# EAGLE board pc_healthypi_5.6 (EAGLE 9.6.2), part 1 of 2
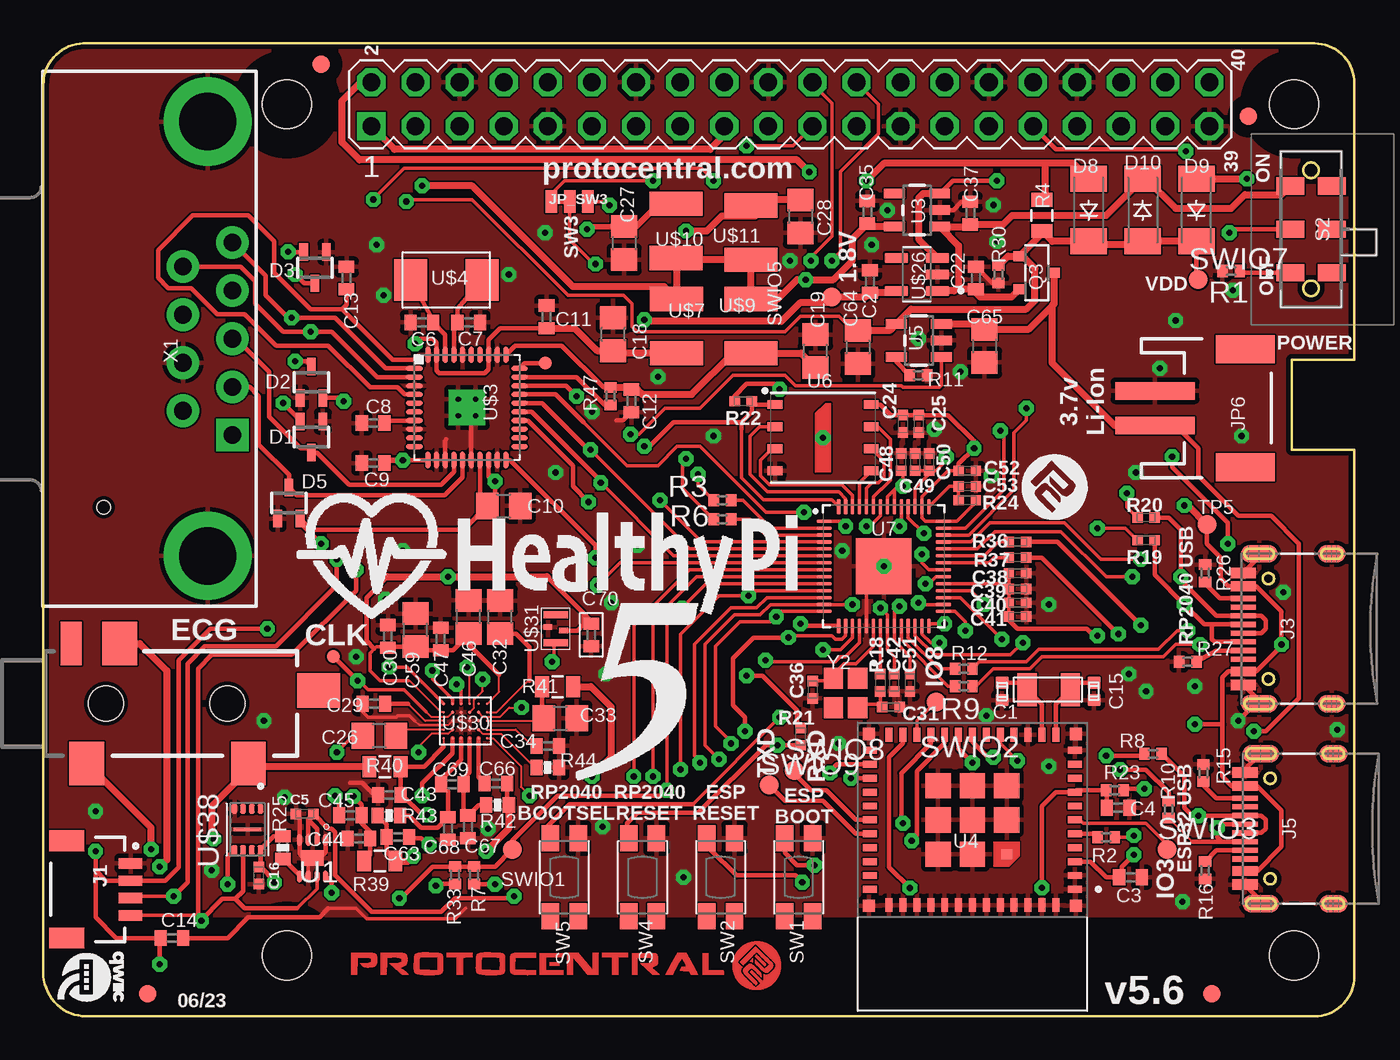
[diagram p0: board, top side]
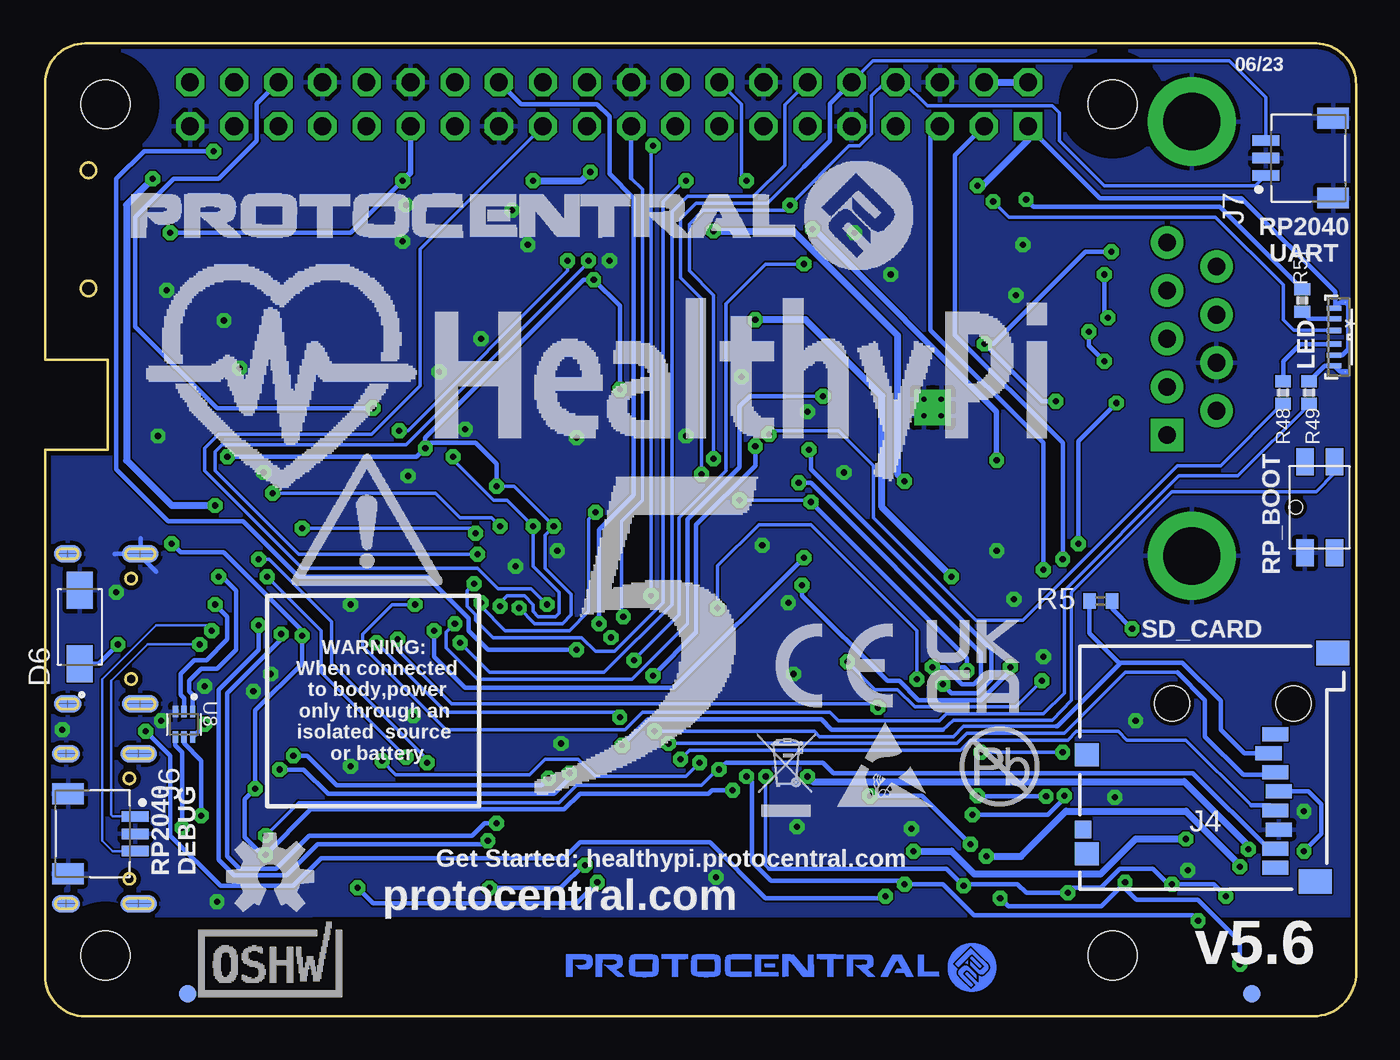
[diagram p1: board, bottom side, seen from below]

Size 75.5 x 56.01 mm. Coordinates in mm from the lower left corner, seen from the top.
Outline: 69.47,26.33 69.44,26.33 69.41,26.33 69.39,26.34 69.36,26.35 69.34,26.36 69.31,26.37 69.29,26.38 69.27,26.4 69.25,26.42 69.23,26.43 69.22,26.46 69.2,26.48 69.19,26.5 69.18,26.52 69.17,26.55 69.17,26.58 69.17,26.6 69.17,26.63 69.17,26.65 69.17,26.68 69.17,26.71 69.18,26.73 69.19,26.75 69.2,26.78 69.22,26.8 69.23,26.82 69.25,26.84 69.27,26.86 69.29,26.87 69.31,26.89 69.34,26.9 69.36,26.91 69.39,26.92 69.41,26.92 69.44,26.93 69.47,26.93 70.56,26.93 70.59,26.93 70.62,26.92 70.64,26.92 70.67,26.91 70.69,26.9 70.72,26.89 70.74,26.87 70.76,26.86 70.78,26.84 70.8,26.82 70.81,26.8 70.83,26.78 70.84,26.75 70.85,26.73 70.86,26.71 70.86,26.68 70.86,26.65 70.86,26.63 70.86,26.6 70.86,26.58 70.86,26.55 70.85,26.52 70.84,26.5 70.83,26.48 70.81,26.46 70.8,26.43 70.78,26.42 70.76,26.4 70.74,26.38 70.72,26.37 70.69,26.36 70.67,26.35 70.64,26.34 70.62,26.33 70.59,26.33 70.56,26.33 69.47,26.33
Outline: 73.03,48.26 arc173 73.03,49.16 72.97,49.16 arc173 72.97,48.26 73.03,48.26
Outline: 70.57,19.09 arc172 70.57,19.74 70.52,19.74 arc172 70.52,19.09 70.57,19.09
Outline: 70.57,24.87 arc172 70.57,25.52 70.52,25.52 arc172 70.52,24.87 70.57,24.87
Outline: 73.03,41.46 arc173 73.03,42.36 72.97,42.36 arc173 72.97,41.46 73.03,41.46
Outline: 70.67,7.59 arc172 70.67,8.24 70.62,8.24 arc172 70.62,7.59 70.67,7.59
Outline: 73.98,14.83 73.95,14.83 73.93,14.83 73.9,14.84 73.88,14.85 73.85,14.86 73.83,14.87 73.81,14.88 73.79,14.9 73.77,14.92 73.75,14.93 73.73,14.96 73.72,14.98 73.71,15 73.7,15.02 73.69,15.05 73.69,15.08 73.68,15.1 73.68,15.13 73.68,15.15 73.69,15.18 73.69,15.21 73.7,15.23 73.71,15.25 73.72,15.28 73.73,15.3 73.75,15.32 73.77,15.34 73.79,15.36 73.81,15.37 73.83,15.39 73.85,15.4 73.88,15.41 73.9,15.42 73.93,15.42 73.95,15.43 73.98,15.43 74.6,15.43 74.63,15.43 74.65,15.42 74.68,15.42 74.7,15.41 74.73,15.4 74.75,15.39 74.77,15.37 74.79,15.36 74.81,15.34 74.83,15.32 74.85,15.3 74.86,15.28 74.87,15.25 74.88,15.23 74.89,15.21 74.89,15.18 74.9,15.15 74.9,15.13 74.9,15.1 74.89,15.08 74.89,15.05 74.88,15.02 74.87,15 74.86,14.98 74.85,14.96 74.83,14.93 74.81,14.92 74.79,14.9 74.77,14.88 74.75,14.87 74.73,14.86 74.7,14.85 74.68,14.84 74.65,14.83 74.63,14.83 74.6,14.83 73.98,14.83
Outline: 73.88,17.69 73.85,17.69 73.83,17.69 73.8,17.7 73.78,17.71 73.75,17.72 73.73,17.73 73.71,17.74 73.69,17.76 73.67,17.78 73.65,17.79 73.63,17.82 73.62,17.84 73.61,17.86 73.6,17.88 73.59,17.91 73.58,17.94 73.58,17.96 73.58,17.99 73.58,18.01 73.58,18.04 73.59,18.07 73.6,18.09 73.61,18.11 73.62,18.14 73.63,18.16 73.65,18.18 73.67,18.2 73.69,18.22 73.71,18.23 73.73,18.25 73.75,18.26 73.78,18.27 73.8,18.28 73.83,18.28 73.85,18.29 73.88,18.29 74.5,18.29 74.53,18.29 74.55,18.28 74.58,18.28 74.6,18.27 74.63,18.26 74.65,18.25 74.67,18.23 74.69,18.22 74.71,18.2 74.73,18.18 74.75,18.16 74.76,18.14 74.77,18.11 74.78,18.09 74.79,18.07 74.8,18.04 74.8,18.01 74.8,17.99 74.8,17.96 74.8,17.94 74.79,17.91 74.78,17.88 74.77,17.86 74.76,17.84 74.75,17.82 74.73,17.79 74.71,17.78 74.69,17.76 74.67,17.74 74.65,17.73 74.63,17.72 74.6,17.71 74.58,17.7 74.55,17.69 74.53,17.69 74.5,17.69 73.88,17.69
Outline: 73.88,26.33 73.85,26.33 73.83,26.33 73.8,26.34 73.78,26.35 73.75,26.36 73.73,26.37 73.71,26.38 73.69,26.4 73.67,26.42 73.65,26.43 73.63,26.46 73.62,26.48 73.61,26.5 73.6,26.52 73.59,26.55 73.58,26.58 73.58,26.6 73.58,26.63 73.58,26.65 73.58,26.68 73.59,26.71 73.6,26.73 73.61,26.75 73.62,26.78 73.63,26.8 73.65,26.82 73.67,26.84 73.69,26.86 73.71,26.87 73.73,26.89 73.75,26.9 73.78,26.91 73.8,26.92 73.83,26.92 73.85,26.93 73.88,26.93 74.5,26.93 74.53,26.93 74.55,26.92 74.58,26.92 74.6,26.91 74.63,26.9 74.65,26.89 74.67,26.87 74.69,26.86 74.71,26.84 74.73,26.82 74.75,26.8 74.76,26.78 74.77,26.75 74.78,26.73 74.79,26.71 74.8,26.68 74.8,26.65 74.8,26.63 74.8,26.6 74.8,26.58 74.79,26.55 74.78,26.52 74.77,26.5 74.76,26.48 74.75,26.46 74.73,26.43 74.71,26.42 74.69,26.4 74.67,26.38 74.65,26.37 74.63,26.36 74.6,26.35 74.58,26.34 74.55,26.33 74.53,26.33 74.5,26.33 73.88,26.33
Outline: 73.98,6.19 73.95,6.19 73.93,6.19 73.9,6.2 73.88,6.21 73.85,6.22 73.83,6.23 73.81,6.24 73.79,6.26 73.77,6.28 73.75,6.29 73.73,6.32 73.72,6.34 73.71,6.36 73.7,6.38 73.69,6.41 73.69,6.44 73.68,6.46 73.68,6.49 73.68,6.51 73.69,6.54 73.69,6.57 73.7,6.59 73.71,6.61 73.72,6.64 73.73,6.66 73.75,6.68 73.77,6.7 73.79,6.72 73.81,6.73 73.83,6.75 73.85,6.76 73.88,6.77 73.9,6.78 73.93,6.78 73.95,6.79 73.98,6.79 74.6,6.79 74.63,6.79 74.65,6.78 74.68,6.78 74.7,6.77 74.73,6.76 74.75,6.75 74.77,6.73 74.79,6.72 74.81,6.7 74.83,6.68 74.85,6.66 74.86,6.64 74.87,6.61 74.88,6.59 74.89,6.57 74.89,6.54 74.9,6.51 74.9,6.49 74.9,6.46 74.89,6.44 74.89,6.41 74.88,6.38 74.87,6.36 74.86,6.34 74.85,6.32 74.83,6.29 74.81,6.28 74.79,6.26 74.77,6.24 74.75,6.23 74.73,6.22 74.7,6.21 74.68,6.2 74.65,6.19 74.63,6.19 74.6,6.19 73.98,6.19
Outline: 69.56,14.83 69.54,14.83 69.51,14.83 69.49,14.84 69.46,14.85 69.44,14.86 69.42,14.87 69.39,14.88 69.37,14.9 69.35,14.92 69.33,14.93 69.32,14.96 69.31,14.98 69.29,15 69.28,15.02 69.28,15.05 69.27,15.08 69.27,15.1 69.27,15.13 69.27,15.15 69.27,15.18 69.28,15.21 69.28,15.23 69.29,15.25 69.31,15.28 69.32,15.3 69.33,15.32 69.35,15.34 69.37,15.36 69.39,15.37 69.42,15.39 69.44,15.4 69.46,15.41 69.49,15.42 69.51,15.42 69.54,15.43 69.56,15.43 70.67,15.43 70.69,15.43 70.72,15.42 70.74,15.42 70.77,15.41 70.79,15.4 70.81,15.39 70.84,15.37 70.86,15.36 70.88,15.34 70.89,15.32 70.91,15.3 70.92,15.28 70.94,15.25 70.95,15.23 70.95,15.21 70.96,15.18 70.96,15.15 70.97,15.13 70.96,15.1 70.96,15.08 70.95,15.05 70.95,15.02 70.94,15 70.92,14.98 70.91,14.96 70.89,14.93 70.88,14.92 70.86,14.9 70.84,14.88 70.81,14.87 70.79,14.86 70.77,14.85 70.74,14.84 70.72,14.83 70.69,14.83 70.67,14.83 69.56,14.83
Outline: 69.56,6.19 69.54,6.19 69.51,6.19 69.49,6.2 69.46,6.21 69.44,6.22 69.42,6.23 69.39,6.24 69.37,6.26 69.35,6.28 69.33,6.29 69.32,6.32 69.31,6.34 69.29,6.36 69.28,6.38 69.28,6.41 69.27,6.44 69.27,6.46 69.27,6.49 69.27,6.51 69.27,6.54 69.28,6.57 69.28,6.59 69.29,6.61 69.31,6.64 69.32,6.66 69.33,6.68 69.35,6.7 69.37,6.72 69.39,6.73 69.42,6.75 69.44,6.76 69.46,6.77 69.49,6.78 69.51,6.78 69.54,6.79 69.56,6.79 70.67,6.79 70.69,6.79 70.72,6.78 70.74,6.78 70.77,6.77 70.79,6.76 70.81,6.75 70.84,6.73 70.86,6.72 70.88,6.7 70.89,6.68 70.91,6.66 70.92,6.64 70.94,6.61 70.95,6.59 70.95,6.57 70.96,6.54 70.96,6.51 70.97,6.49 70.96,6.46 70.96,6.44 70.95,6.41 70.95,6.38 70.94,6.36 70.92,6.34 70.91,6.32 70.89,6.29 70.88,6.28 70.86,6.26 70.84,6.24 70.81,6.23 70.79,6.22 70.77,6.21 70.74,6.2 70.72,6.19 70.69,6.19 70.67,6.19 69.56,6.19
Outline: 69.47,17.69 69.44,17.69 69.41,17.69 69.39,17.7 69.36,17.71 69.34,17.72 69.31,17.73 69.29,17.74 69.27,17.76 69.25,17.78 69.23,17.79 69.22,17.82 69.2,17.84 69.19,17.86 69.18,17.88 69.17,17.91 69.17,17.94 69.17,17.96 69.17,17.99 69.17,18.01 69.17,18.04 69.17,18.07 69.18,18.09 69.19,18.11 69.2,18.14 69.22,18.16 69.23,18.18 69.25,18.2 69.27,18.22 69.29,18.23 69.31,18.25 69.34,18.26 69.36,18.27 69.39,18.28 69.41,18.28 69.44,18.29 69.47,18.29 70.56,18.29 70.59,18.29 70.62,18.28 70.64,18.28 70.67,18.27 70.69,18.26 70.72,18.25 70.74,18.23 70.76,18.22 70.78,18.2 70.8,18.18 70.81,18.16 70.83,18.14 70.84,18.11 70.85,18.09 70.86,18.07 70.86,18.04 70.86,18.01 70.86,17.99 70.86,17.96 70.86,17.94 70.86,17.91 70.85,17.88 70.84,17.86 70.83,17.84 70.81,17.82 70.8,17.79 70.78,17.78 70.76,17.76 70.74,17.74 70.72,17.73 70.69,17.72 70.67,17.71 70.64,17.7 70.62,17.69 70.59,17.69 70.56,17.69 69.47,17.69
Outline: 70.67,13.37 arc172 70.67,14.02 70.62,14.02 arc172 70.62,13.37 70.67,13.37
Outline: 0,53.61 0,2.31 arc90 2.7,0.01 73.2,0.01 73.4,0.02 arc85 75.5,2.31 75.5,32.61 71.9,32.61 71.9,37.81 75.5,37.81 75.5,53.71 75.49,53.91 arc85 73.2,56.01 2.3,56.01 2.1,55.99 arc85 0,53.61
Copper layers (1*16): Top 0.035mm / dielectric 1.5mm / Bottom 0.035mm
Design rules "Circuitects-Rules *": minimum track width 3mil, minimum drill 0.1mm, track to track 4mil, track to pad 4mil, pad to pad 4mil, via to via 6mil, smd to smd 6mil, copper to edge 10mil, drill to drill 4mil, minimum pad ring 12mil, minimum via ring 10mil, stop-mask expansion 4mil, vias tented up to drill 25mil, thermal gap 10mil
Net classes: 1 power: width 0.178 mm; 2 Clock: width 0.089 mm, clearance 0.178 mm; 4 USBpair: width 0.102 mm, drill 0.1 mm, clearance 0.15 mm to class 3
Holes 2.8 mm at 72.02,3.51 72.02,52.51 14.02,52.51 14.02,3.51
Holes 0.9 mm at 73,48.71 73,41.91
Holes 0.65 mm at 70.64,7.92 70.64,13.7 70.55,19.42 70.55,25.2
tRestrict: area 12.5,51 to 15.6,54.1; area 70.5,51 to 73.6,54.1; area 70.5,2 to 73.6,5.1; area 12.5,2 to 15.6,5.1
bRestrict: area 12.5,2 to 15.6,5.1; area 12.5,51 to 15.6,54.1; area 70.5,2 to 73.6,5.1; area 70.5,51 to 73.6,54.1

## Footprints (pad centres in the part's own frame; a part is rotated, then mirrored left to right if it is on the bottom)
C0402 = smd 0.75 x 0.7: 1 0,0.5; 2 0,-0.5
C0402' = smd 0.7 x 0.9: 1 -0.65,0; 2 0.65,0
0402-TIGHT = smd 0.6 x 0.6: 1 -0.5,0; 2 0.5,0
C0805 = smd 1.3 x 1.5: 1 -0.95,0; 2 0.95,0
0402 = smd 0.7 x 0.9: 1 -0.65,0; 2 0.65,0
SOT323 = smd 0.5 x 1: 1 0,0.9; 2 -0.65,-0.9; 3 0.65,-0.9
DIOM4325X250N = smd 2.12 x 1.5: A 2.115,0; C -2.115,0
SOD-123_MINI-SMA = smd 1.5 x 2.1: A 1.8,0; C -1.8,0
JST04_1MM_RA = smd 0.6 x 1.35: 1 -1.5,0; 2 -0.5,0; 3 0.5,0; 4 1.5,0 | smd 1.2 x 2: NC1 2.8,-3.675; NC2 -2.8,-3.675
USB-C-16P = smd 0.3 x 1.45: A5 -1.25,0; A6 -0.25,0; A7 0.25,0; A8 1.25,0; B5 1.75,0; B6 0.75,0; B7 -0.75,0; B8 -1.75,0 | smd 0.6 x 1.45: GND -3.225,0; GND2 3.225,0 | smd 1 x 2.1: SHLD1 -4.32,-0.915; SHLD2 4.32,-0.915 | smd 1 x 2.1 bottom: SHLD3 -4.32,-0.915; SHLD4 4.32,-0.915 | smd 1 x 1.6: SHLD5 -4.32,-5.095; SHLD8 4.32,-5.095 | smd 1 x 1.6 bottom: SHLD6 -4.32,-5.095; SHLD7 4.32,-5.095 | smd 0.55 x 1.45: VBUS1 -2.45,0; VBUS2 2.45,0 | hole 0.65: -2.89,-1.445; 2.89,-1.445
GCT_MEM2051-00-195-00-A = smd 0.8 x 1.5: 1 1.94,-3.66; 2 0.84,-3.26; 3 -0.26,-3.66; 4 -1.36,-3.86; 5 -2.46,-3.66; 6 -3.56,-3.86; 7 -4.66,-3.66; 8 -5.76,-3.66 | smd 1 x 0.95: 9 -3.56,7.425 | smd 1.3 x 1.4: P1 -4.95,7.2; P2 0.75,7.2 | smd 1.4 x 1.9: P3 6.6,-6.95; P4 -6.55,-5.95
JST_SM03B-SRSS-TB(LF)(SN) = smd 0.6 x 1.55: 1 -1,0; 2 0,0; 3 1,0 | smd 1.2 x 1.8: S1 -2.3,-3.875; S2 2.3,-3.875
AUDIO-JACK-3.5MM-SMD = smd 2 x 2.5: RING 4.3,3.45; SLEEVE 2.4,-3.45; TIP 11.7,-3.45 | smd 1.2 x 2.5: RSH 1.5,3.45 | smd 2.5 x 2: TSH 15.75,0.75 | hole 2: 3.5,0; 10.5,0
JST-2-SMD = smd 1 x 4.6: 1 -1,-3.7; 2 1,-3.7 | smd 1.6 x 3.4: NC1 -3.4,1.5; NC2 3.4,1.5
SMT-JUMPER_3_1-NC_TRACE_NO-SILK = smd 0.66 x 1.27: 1 -1.041,0; 2 0,0; 3 1.041,0
PIN_20X2 = drill 1.016 square: 1 -24.13,-1.27 | drill 1.016 octagon: 2 -24.13,1.27; 3 -21.59,-1.27; 4 -21.59,1.27; 5 -19.05,-1.27; 6 -19.05,1.27; 7 -16.51,-1.27; 8 -16.51,1.27; 9 -13.97,-1.27; 10 -13.97,1.27; 11 -11.43,-1.27; 12 -11.43,1.27; 13 -8.89,-1.27; 14 -8.89,1.27; 15 -6.35,-1.27; 16 -6.35,1.27; 17 -3.81,-1.27; 18 -3.81,1.27; 19 -1.27,-1.27; 20 -1.27,1.27; 21 1.27,-1.27; 22 1.27,1.27; 23 3.81,-1.27; 24 3.81,1.27; 25 6.35,-1.27; 26 6.35,1.27; 27 8.89,-1.27; 28 8.89,1.27; 29 11.43,-1.27; 30 11.43,1.27; 31 13.97,-1.27; 32 13.97,1.27; 33 16.51,-1.27; 34 16.51,1.27; 35 19.05,-1.27; 36 19.05,1.27; 37 21.59,-1.27; 38 21.59,1.27; 39 24.13,-1.27; 40 24.13,1.27
LTST-008BGEW_LTO = smd 0.051 x 0.051: 1 2,0.372; 8 -2,0.372 | smd 0.305 x 0.813: 2 1.65,-0.268; 3 1.05,-0.268; 4 0.41,-0.268; 5 -0.38,-0.268; 6 -1.05,-0.268; 7 -1.65,-0.268
SOT23-R = smd 0.6 x 0.7: 1 -0.95,-1; 2 0.95,-1; 3 0,1
R0402 = smd 0.6 x 0.7: 1 -0.5,0; 2 0.5,0
0805 = smd 0.8 x 1.2: 1 -0.9,0; 2 0.9,0
R0402' = smd 0.7 x 0.9: 1 -0.65,0; 2 0.65,0
0402-RES = smd 0.7 x 0.9: 1 -0.65,0; 2 0.65,0
JS202011JAQN = smd 1 x 1.6: 1 -2.5,1.2; 2 0,1.2; 3 2.5,1.2; 4 -2.5,-1.2; 5 0,-1.2; 6 2.5,-1.2 | hole 0.9: -3.4,0; 3.4,0
BTN_KMR2_4.6X2.8 = smd 1.5 x 1: A 2.25,0.8; A' -2.25,0.8; B 2.25,-0.8; B' -2.25,-0.8
TP11R = smd 1.1 x 1.1: TP 0,0
PAD.03X.03 = smd 0.762 x 0.762: P$1 0,0
SON50P200X200X80-9N = smd 0.7 x 0.3: 1 -1.05,0.75; 2 -1.05,0.25; 3 -1.05,-0.25; 4 -1.05,-0.75; 5 1.05,-0.75; 6 1.05,-0.25; 7 1.05,0.25; 8 1.05,0.75 | smd 0.9 x 1.3: 9 0,0
SOT23-5 = smd 0.55 x 1.2: 1 -0.95,-1.3; 2 0,-1.3; 3 0.95,-1.3; 4 0.95,1.3; 5 -0.95,1.3
XCVR_ESP32-C3-MINI-1-N4 = smd 0.8 x 0.4: 1 -5.9,1.3; 2 -5.9,0.5; 3 -5.9,-0.3; 4 -5.9,-1.1; 5 -5.9,-1.9; 6 -5.9,-2.7; 7 -5.9,-3.5; 8 -5.9,-4.3; 9 -5.9,-5.1; 10 -5.9,-5.9; 11 -5.9,-6.7; 25 5.9,-6.7; 26 5.9,-5.9; 27 5.9,-5.1; 28 5.9,-4.3; 29 5.9,-3.5; 30 5.9,-2.7; 31 5.9,-1.9; 32 5.9,-1.1; 33 5.9,-0.3; 34 5.9,0.5; 35 5.9,1.3 | smd 0.4 x 0.8: 12 -4.8,-7.6; 13 -4,-7.6; 14 -3.2,-7.6; 15 -2.4,-7.6; 16 -1.6,-7.6; 17 -0.8,-7.6; 18 0,-7.6; 19 0.8,-7.6; 20 1.6,-7.6; 21 2.4,-7.6; 22 3.2,-7.6; 23 4,-7.6; 24 4.8,-7.6; 36 4.8,2.2; 37 4,2.2; 38 3.2,2.2; 39 2.4,2.2; 40 1.6,2.2; 41 0.8,2.2; 42 0,2.2; 43 -0.8,2.2; 44 -1.6,2.2; 45 -2.4,2.2; 46 -3.2,2.2; 47 -4,2.2; 48 -4.8,2.2 | smd 0.6 x 0.6: 49_1 -1.975,-0.725 | smd 1.45 x 1.45: 49_2 0,-0.725; 49_3 1.975,-0.725; 49_4 1.975,-2.7; 49_5 1.975,-4.675; 49_6 0,-4.675; 49_7 -1.975,-4.675; 49_8 -1.975,-2.7; 49_9 0,-2.7 | smd 0.7 x 0.7: 50 5.95,2.25; 51 5.95,-7.65; 52 -5.95,-7.65; 53 -5.95,2.25
WSON-8-6X5-SKINNY_CENTERPAD = smd 0.85 x 0.5: 1 -2.775,1.905; 2 -2.775,0.635; 3 -2.775,-0.635; 4 -2.775,-1.905; 5 2.775,-1.905; 6 2.775,-0.635; 7 2.775,0.635; 8 2.775,1.905
QFN-56 = smd 0.875 x 0.2: 1 -3.437,2.6; 2 -3.437,2.2; 3 -3.437,1.8; 4 -3.437,1.4; 5 -3.437,1; 6 -3.437,0.6; 7 -3.437,0.2; 8 -3.437,-0.2; 9 -3.437,-0.6; 10 -3.437,-1; 11 -3.437,-1.4; 12 -3.437,-1.8; 13 -3.437,-2.2; 14 -3.437,-2.6; 29 3.437,-2.6; 30 3.437,-2.2; 31 3.437,-1.8; 32 3.437,-1.4; 33 3.437,-1; 34 3.437,-0.6; 35 3.437,-0.2; 36 3.437,0.2; 37 3.437,0.6; 38 3.437,1; 39 3.437,1.4; 40 3.437,1.8; 41 3.437,2.2; 42 3.437,2.6 | smd 0.2 x 0.875: 15 -2.6,-3.437; 16 -2.2,-3.437; 17 -1.8,-3.437; 18 -1.4,-3.437; 19 -1,-3.437; 20 -0.6,-3.437; 21 -0.2,-3.437; 22 0.2,-3.437; 23 0.6,-3.437; 24 1,-3.437; 25 1.4,-3.437; 26 1.8,-3.437; 27 2.2,-3.437; 28 2.6,-3.437; 43 2.6,3.437; 44 2.2,3.437; 45 1.8,3.437; 46 1.4,3.437; 47 1,3.437; 48 0.6,3.437; 49 0.2,3.437; 50 -0.2,3.437; 51 -0.6,3.437; 52 -1,3.437; 53 -1.4,3.437; 54 -1.8,3.437; 55 -2.2,3.437; 56 -2.6,3.437 | smd 3.2 x 3.2: EPAD 0,0
SOTFL50P160X60-6N = smd 0.66 x 0.31: 1 -0.735,0.5; 2 -0.735,0; 3 -0.735,-0.5; 4 0.735,-0.5; 5 0.735,0; 6 0.735,0.5
FIDUCIALPOINTS = smd 1 x 1: TP 0,0
QFN-40 = smd 0.95 x 0.28: 1 -3.025,2.25; 2 -3.025,1.75; 3 -3.025,1.25; 4 -3.025,0.75; 5 -3.025,0.25; 6 -3.025,-0.25; 7 -3.025,-0.75; 8 -3.025,-1.25; 9 -3.025,-1.75; 10 -3.025,-2.25; 21 3.025,-2.25; 22 3.025,-1.75; 23 3.025,-1.25; 24 3.025,-0.75; 25 3.025,-0.25; 26 3.025,0.25; 27 3.025,0.75; 28 3.025,1.25; 29 3.025,1.75; 30 3.025,2.25 | smd 0.28 x 0.95: 11 -2.25,-3.025; 12 -1.75,-3.025; 13 -1.25,-3.025; 14 -0.75,-3.025; 15 -0.25,-3.025; 16 0.25,-3.025; 17 0.75,-3.025; 18 1.25,-3.025; 19 1.75,-3.025; 20 2.25,-3.025; 31 2.25,3.025; 32 1.75,3.025; 33 1.25,3.025; 34 0.75,3.025; 35 0.25,3.025; 36 -0.25,3.025; 37 -0.75,3.025; 38 -1.25,3.025; 39 -1.75,3.025; 40 -2.25,3.025 | drill 0.3 pad 1.1 square: EXP@6 -0.5,0.475; EXP@7 0.5,0.475; EXP@10 -0.5,-0.475; EXP@11 0.5,-0.475
ABM3 = smd 1.9 x 2.4: 1 -2.05,0; 2 2.05,0
LPS = smd 1.4 x 3.05: 1 -1.56,0; 2 1.56,0
ECX-31B = smd 1.1 x 1.9: P$1 1.25,0; P$2 -1.25,0
EVQ-PUC = smd 1.55 x 1: 1 2.625,0.85; 2 2.625,-0.85; 3 -2.625,0.85; 4 -2.625,-0.85 | hole 0.75: 0,1.375
SOT95P285X140-5N = smd 1.35 x 0.6: 1 -1.185,0.95; 2 -1.185,0; 3 -1.185,-0.95; 4 1.185,-0.95; 5 1.185,0.95
30WLP = smd 0.15 x 0.15: A1 -1.25,1; A2 -0.75,1; A3 -0.25,1; A4 0.25,1; A5 0.75,1; A6 1.25,1; B1 -1.25,0.5; B6 1.25,0.5; C1 -1.25,0; C6 1.25,0; D1 -1.25,-0.5; D6 1.25,-0.5; E1 -1.25,-1; E2 -0.75,-1; E3 -0.25,-1; E4 0.25,-1; E5 0.75,-1; E6 1.25,-1 | smd 0.2 x 0.2: B2 -0.75,0.5; B3 -0.25,0.5; B4 0.25,0.5; B5 0.75,0.5; C2 -0.75,0; C3 -0.25,0; C4 0.25,0; C5 0.75,0; D2 -0.75,-0.5; D3 -0.25,-0.5; D4 0.25,-0.5; D5 0.75,-0.5
SIT1533 = smd 0.4 x 1.4: 1 -0.8,0; 3 0.8,0 | smd 0.3 x 0.5: 2 -0.1,-0.45; 4 0.1,0.45
PSON50P200X300X60-9N = smd 0.56 x 0.35: 1 -1.185,0.75; 2 -1.185,0.25; 3 -1.185,-0.25; 4 -1.185,-0.75; 5 1.185,-0.75; 6 1.185,-0.25; 7 1.185,0.25; 8 1.185,0.75 | smd 0.2 x 1.6: 9 0,0
DB9 = drill 1.016 pad 1.88 square: 1 -5.54,-1.42 | drill 1.016 pad 1.88: 2 -2.77,-1.42; 3 0,-1.42; 4 2.77,-1.42; 5 5.54,-1.42; 6 -4.15,1.42; 7 -1.38,1.42; 8 1.38,1.42; 9 4.15,1.42 | drill 3.302 pad 5.08: G1 -12.5,0; G2 12.5,0
CRYSTAL-SMD-2X2.5MM = smd 1.2 x 1.1: P1 0.846,0.69; P2 -0.854,0.69; P3 -0.854,-0.71; P4 0.846,-0.71

## Placement (x,y rotation side)
C1  12pF  [C0402]  55.2,18.71 0 top
C2  100nF  [C0402']  47.6,42.31 90 top
C3  1u  [C0402']  62.6,8.01 180 top
C4  1u  [C0402']  61.9,12.01 180 top
C5  0.1uF  [0402-TIGHT]  15.05,11.66 180 top
C6  22p  [C0402']  21.79,39.95 0 top
C7  22p  [C0402']  24.49,39.95 180 top
C8  2.2u  [C0402']  18.99,34.15 180 top
C9  0.1u  [C0402']  18.99,31.85 180 top
C10  1u  [C0805]  26.51,29.38 0 top
C11  0.1u  [C0402']  28.97,40.27 90 top
C12  0.1u  [C0402']  33.86,35.43 270 top
C13  2.2u  [C0402']  17.46,42.5 90 top
C14  100nF  [C0402']  7.4,4.51 0 top
C15  12pF  [C0402]  60.5,18.71 180 top
C16  0.1uF  [0402-TIGHT]  12.4,8.11 270 top
C18  10uF/0805  [C0805]  32.81,39.27 90 top
C19  10uF/0805  [C0805]  44.46,38.3 90 top
C22  100nF  [C0402']  53.7,42.51 90 top
C24  0.1uF  [0402-TIGHT]  49.5,34.11 270 top
C25  2.2uF  [0402-TIGHT]  50.4,34.11 270 top
C26  10uF/25V  [C0805]  19.34,16.15 180 top
C27  10uF/0805  [C0805]  33.44,44.52 270 top
C28  10uF/0805  [C0805]  43.59,46.05 270 top
C29  1nF  [C0402']  19.03,18 180 top
C30  1uF  [C0402']  19.84,21.88 90 top
C31  15pF  [0402-TIGHT]  48.8,17.81 180 top
C32  10uF  [C0805]  26.31,22.99 90 top
C33  10uF  [C0805]  29.76,17.17 0 top
C34  1uF  [C0402']  29.05,15.57 0 top
C35  1u  [C0402']  47.45,46.29 270 top
C36  15pF  [0402-TIGHT]  44.3,18.81 90 top
C37  1u  [C0402']  53.38,46.24 270 top
C38  0.1uF  [0402-TIGHT]  56.1,25.51 0 top
C39  0.1uF  [0402-TIGHT]  56.1,24.61 0 top
C40  0.1uF  [0402-TIGHT]  56.1,23.81 0 top
C41  0.1uF  [0402-TIGHT]  56.1,23.01 0 top
C42  0.1uF  [0402-TIGHT]  49,19.21 270 top
C43  10pF  [C0402']  19.92,12.74 180 top
C44  10pF  [C0402']  18.17,10.24 180 top
C45  DNP  [C0402']  17.68,11.58 180 top
C46  10uF  [C0805]  24.48,23 90 top
C47  1uF  [C0402']  22.88,21.72 90 top
C48  0.1uF  [0402-TIGHT]  49.4,31.91 90 top
C49  0.1uF  [0402-TIGHT]  50.2,31.91 90 top
C50  0.1uF  [0402-TIGHT]  51,31.91 90 top
C51  2.2uF  [0402-TIGHT]  49.9,19.21 270 top
C52  2.2uF  [0402-TIGHT]  53.2,31.41 0 top
C53  2.2uF  [0402-TIGHT]  53.2,30.51 0 top
C59  10uF  [C0805]  21.43,22.24 90 top
C63  47nF  [C0402']  20.41,10.33 0 top
C64  4.7u  [C0805]  46.9,38.52 270 top
C65  4.7u  [C0805]  54.2,38.59 270 top
C66  47nF  [C0402']  26.05,13.41 180 top
C67  DNP  [C0402']  24.45,10.91 270 top
C68  DNP  [C0402']  23.3,10.81 270 top
C69  DNP  [C0402']  23.55,13.36 180 top
C70  1uF  [0402]  31.55,21.96 270 top
D1  BAV99W-7-F  [SOT323]  15.44,33.35 180 top
D2  BAV99W-7-F  [SOT323]  15.44,36.5 0 top
D3  BAV99W-7-F  [SOT323]  15.64,43.1 180 top
D5  BAV99W-7-F  [SOT323]  14.14,29.55 0 top
D6  SMAJ6.0A  [DIOM4325X250N]  73.5,22.41 90 bottom
D8  DNP  [SOD-123_MINI-SMA]  60.2,46.41 90 top
D9  S1B-13-F  [SOD-123_MINI-SMA]  66.4,46.41 90 top
D10  S1B-13-F  [SOD-123_MINI-SMA]  63.3,46.41 270 top
J1  10147606-00004LF  [JST04_1MM_RA]  5.02,7.31 270 top
J3  USB4105-GF-A  [USB-C-16P]  69.1,22.31 90 top
J4  MEM2051-00-195-00-A  [GCT_MEM2051-00-195-00-A]  8.3,14.31 90 bottom
J5  USB4105-GF-A  [USB-C-16P]  69.2,10.81 90 top
J6  SM03B-SRSS-TB(LF)(SN)  [JST_SM03B-SRSS-TB(LF)(SN)]  70.3,10.51 270 bottom
J7  SM03B-SRSS-TB(LF)(SN)  [JST_SM03B-SRSS-TB(LF)(SN)]  5.2,49.41 90 bottom
JP3  35RASMT4BHNTRX  [AUDIO-JACK-3.5MM-SMD]  0.1,18.01 0 top
JP6  S2B-PH-SM4-TB(LF) (SN)  [JST-2-SMD]  67.72,35.01 270 top
JP_SW3  JUMPER-SMT_3_1-NC_TRACE_NO-SILK  [SMT-JUMPER_3_1-NC_TRACE_NO-SILK]  30.3,46.91 180 top
K1  PIN20X2 (2223)  [PIN_20X2]  43.02,52.51 0 top
LED1  LTST-006GEBW-P2  [LTST-008BGEW_LTO]  1,39.11 270 bottom
Q3  SI2323DS-TI-GE3  [SOT23-R]  57.2,42.81 270 top
R1  DNP  [R0402]  68.4,42.91 0 top
R2  0R  [R0402]  61.2,10.31 180 top
R3  100R  [R0402]  39.1,29.71 180 top
R4  0R  [0805]  57.5,46.11 270 top
R5  10K  [R0402']  14.7,23.91 0 bottom
R6  100R  [R0402]  39.1,28.61 180 top
R7  10K  [R0402]  24.8,8.12 270 top
R8  22R  [R0402]  63.9,15.11 180 top
R9  100R  [R0402]  53,19.01 180 top
R10  22R  [R0402]  64.8,11.91 90 top
R11  1k  [R0402]  50.38,36.91 180 top
R12  100R  [R0402]  53,20.01 180 top
R15  5.1K  [R0402]  66.8,14.01 90 top
R16  5.1K  [R0402]  66.9,8.41 270 top
R18  1k  [0402-TIGHT]  48.2,19.21 90 top
R19  27  [0402-TIGHT]  63.5,27.41 180 top
R20  27  [0402-TIGHT]  63.5,28.71 180 top
R21  1k  [0402-TIGHT]  43.6,16.11 270 top
R22  10k  [0402-TIGHT]  40.3,35.41 180 top
R23  0R  [R0402]  61.7,13.01 0 top
R24  200OHM-0402T-1/16W-1%  [0402-TIGHT]  53.2,29.71 0 top
R25  10K  [0402-RES]  13.8,9.71 90 top
R26  5.1K  [R0402]  66.9,25.51 90 top
R27  5.1K  [R0402]  65.9,20.41 180 top
R30  10K  [R0402]  55,42.71 90 top
R33  10K  [R0402]  23.7,8.12 270 top
R36  0R  [0402-TIGHT]  56.1,27.31 0 top
R37  0R  [0402-TIGHT]  56.1,26.41 0 top
R39  200K  [0805]  19.37,8.94 180 top
R40  200K  [0805]  19.67,14.38 0 top
R41  0R  [0805]  29.61,18.98 0 top
R42  0R  [0402-RES]  26.15,12.16 180 top
R43  0R  [0402-RES]  19.9,11.56 0 top
R44  DNP  [0402-RES]  29.04,14.33 0 top
R47  10K  [R0402]  32.66,35.7 270 top
R48  330R  [0402-RES]  4.2,35.91 90 bottom
R49  330R  [0402-RES]  2.7,35.91 90 bottom
R51  330R  [0402-RES]  3.1,41.21 90 bottom
S2  JS202011JAQN  [JS202011JAQN]  73,45.31 90 top
SW1  KMR211GLFS  [BTN_KMR2_4.6X2.8]  43.5,8.01 270 top
SW2  KMR211GLFS  [BTN_KMR2_4.6X2.8]  39,8.01 270 top
SW4  KMR211GLFS  [BTN_KMR2_4.6X2.8]  34.5,8.01 270 top
SW5  KMR211GLFS  [BTN_KMR2_4.6X2.8]  30,8.01 270 top
SWIO1  TPSQTP11R  [TP11R]  27,9.61 0 top
SWIO2  TPSQTP11R  [TP11R]  51.4,18.11 0 top
SWIO3  TPSQTP11R  [TP11R]  64.7,9.61 0 top
SWIO5  TPSQTP11R  [TP11R]  45.4,41.41 180 top
SWIO7  TPSQTP11R  [TP11R]  66.5,42.41 0 top
SWIO8  TPSQTP11R  [TP11R]  43.24,14.16 0 top
SWIO9  TPSQTP11R  [TP11R]  41.8,13.31 0 top
TP2  TEST-POINT3  [PAD.03X.03]  16.7,20.71 0 top
TP4  TEST-POINT3  [PAD.03X.03]  28.89,37.6 0 top
TP5  TPSQTP11R  [TP11R]  67,28.31 0 top
U1  MAX17048G+TDFN-08  [SON50P200X200X80-9N]  15.5,9.11 270 top
U3  TCR2EF33,LM(CT  [SOT23-5]  50.32,46.41 90 top
U4  ESP32-C3-MINI-1-N4  [XCVR_ESP32-C3-MINI-1-N4]  53.5,8.61 180 top
U5  MCP73831T-2ATI/OT  [SOT23-5]  50.42,38.91 90 top
U6  W25Q128JVPIQ  [WSON-8-6X5-SKINNY_CENTERPAD]  44.9,33.31 0 top
U7  RP2040TR13  [QFN-56]  48.4,25.91 0 top
U8  TPD4E001DRLR_1  [SOTFL50P160X60-6N]  67.5,16.81 270 bottom
U$1  FUDCIALPOINTS  [FIDUCIALPOINTS]  16,54.81 0 top
U$2  [HEALTHYPI_5_ONLY]  30.7,13.61 0 top
U$3  AFE4400RHAR  [QFN-40]  24.39,35.05 0 top
U$4  ABM3  [ABM3]  23.2,42.39 180 top
U$5  OSHW-LOGOM  [OSHW-LOGO-M]  62.54,8.04 0 bottom
U$7  MAKK2520H100M  [LPS]  36.46,39.73 270 top
U$9  MAKK2520H100M  [LPS]  40.76,39.73 270 top
U$10  MAKK2520H100M  [LPS]  36.44,45.21 90 top
U$11  MAKK2520H100M  [LPS]  40.74,45.11 90 top
U$13  [CERT-SMALL-SILK]  62.54,1.11 0 bottom
U$14  [CESYMBOLE-5MM]  34.3,16.61 0 bottom
U$17  [WARNINGSYM]  61.4,24.71 0 bottom
U$18  [HEALTHYPIFIT]  14.6,18.21 0 top
U$19  520-327-12.5-34B(32.768KHZ)  [ECX-31B]  57.9,18.81 180 top
U$20  [HEALTHYPIV5LOGO]  69.6,12.81 0 bottom
U$21  FUDCIALPOINTS  [FIDUCIALPOINTS]  67.3,1.31 0 top
U$22  [PC_LOGO_ONELINE_ROUND]  17.6,1.41 0 top
U$23  FUDCIALPOINTS  [FIDUCIALPOINTS]  6,1.31 0 top
U$24  EVQ-PUC  [EVQ-PUC]  2.1,29.31 90 bottom
U$25  FUDCIALPOINTS  [FIDUCIALPOINTS]  67.3,1.31 0 bottom
U$26  TCR2EF18,LM(CT  [SOT95P285X140-5N]  50.3,42.71 180 top
U$27  [PC_LOGO_ONELINE_ROUND]  45.6,1.31 0 bottom
U$28  FUDCIALPOINTS  [FIDUCIALPOINTS]  69.4,51.81 0 top
U$29  FUDCIALPOINTS  [FIDUCIALPOINTS]  6,1.31 0 bottom
U$30  MAX30001CWV+  [30WLP]  24.3,17.01 180 top
U$31  SIT1533AI-H4-DCC-32.768E  [SIT1533]  29.5,22.31 270 top
U$35  [PCROUNDLOGO]  52.7,26.41 0 top
U$36  [PCLOGOV3]  70.5,43.01 0 bottom
U$38  ATECC608A-MAHDA-T  [PSON50P200X300X60-9N]  11.75,10.76 270 top
U$47  [ESDSYMBOLE]  30,11.61 0 bottom
U$51  [UKCE]  24.7,17.51 0 bottom
U$52  [WEE_SYMBOLE]  34.5,11.51 0 bottom
U$53  [PB_FREE_SYMBOLE]  22.9,12.01 0 bottom
U$59  [QWIIC#LABEL#FULL#M#PNG]  2.73,2.34 270 top
X1  A-DF09A/KG-T2S  [DB9]  9.46,39.01 90 top
Y2  NX3225SA-12MHZ-STD-CSR-3  [CRYSTAL-SMD-2X2.5MM]  46.2,18.61 270 top

## Library data of the parts
C1 C15 = Arduino
C2-C4 C6-C13 C18 C19 C22 C26-C30 C32-C35 C37 C43-C47 C59 C63-C69 = rcl; SPICEPREFIX: C
C5 C16 C24 C38-C42 C48-C50 = SparkFun-Capacitors; PROD_ID: CAP-14993
C14 R5 = rcl
C25 C51-C53 = SparkFun-Capacitors; PROD_ID: CAP-14232
C31 C36 = SparkFun-Capacitors; PROD_ID: CAP-13063
C70 Q3 SW1 SW2 SW4 SW5 = microbuilder
D1-D3 D5 = zetex; OC_FARNELL: unknown; OC_NEWARK: unknown
D6 = circuitects; DESCRIPTION: 10.3V Clamp 38.8A Ipp Tvs Diode Surface Mount DO-214AC (SMA); DIGI-KEY_PART_NUMBER: SMAJ6.0ALFTR-ND; MF: Littelfuse; MP: SMAJ6.0A; PACKAGE: DO-214 Littelfuse; PURCHASE-URL: https://pricing.snapeda.com/search?q=SMAJ6.0A&ref=eda
D8-D10 = diode
J1 = SparkFun-Connectors; PROD_ID: CONN-13694; VALUE: QWIIC_RIGHT_ANGLE
J3 = USB-C
J4 = circuitects; AVAILABILITY: In Stock; DESCRIPTION: 9 (8 + 1) Position Card Connector microSD Surface Mount, Right Angle Gold, 1.95mm profile, Normally open switch, Push push, Top mount; MF: Global Connector Technology; MP: MEM2051-00-195-00-A; PACKAGE: None; PRICE: None; PURCHASE-URL: https://pricing.snapeda.com/search/part/MEM2051-00-195-00-A/?ref=eda
J5 U$1-U$4 U$7 U$9-U$11 U$14 U$17-U$31 U$35 U$36 U$38 U$47 U$51-U$53 X1 = circuitects
J6 J7 = circuitects; AVAILABILITY: In Stock; DESCRIPTION: Connector Header Surface Mount, Right Angle 3 position 0.039 (1.00mm); MF: JST Sales America Inc.; MP: SM03B-SRSS-TB(LF)(SN); PACKAGE: None; PRICE: None; PURCHASE-URL: https://pricing.snapeda.com/search/part/SM03B-SRSS-TB(LF)(SN)/?ref=eda
JP3 = circuitects; PROD_ID: CONN-10353
JP6 R4 R25 R39-R44 R48 R49 R51 TP2 TP4 U5 U$5 = SparkFun
JP_SW3 = SparkFun-Jumpers
K1 = FLYFISH
LED1 = circuitects; COPYRIGHT: Copyright (C) 2023 Ultra Librarian. All rights reserved.; DIGI-KEY_PART_NUMBER_1: 160-LTST-006GEBW-P2TR-ND; DIGI-KEY_PART_NUMBER_2: 160-LTST-006GEBW-P2CT-ND; DIGI-KEY_PART_NUMBER_3: 160-LTST-006GEBW-P2DKR-ND; MANUFACTURER_PART_NUMBER: LTST-006GEBW-P2; MFR_NAME: LITE-ON
R1-R3 R6-R12 R15 R16 R23 R26 R27 R30 R33 R47 = rcl; SPICEPREFIX: R
R18 R21 = SparkFun-Resistors; PROD_ID: RES-14342
R19 R20 R36 R37 = SparkFun-Resistors; PROD_ID: RES-15238
R22 = SparkFun-Resistors; PROD_ID: RES-14241
R24 = SparkFun-Resistors; PROD_ID: RES-15550
S2 = circuitects; AVAILABILITY: In Stock; DESCRIPTION: Slide Switch DPDT Surface Mount, Right Angle; MF: C&K; MP: JS202011JAQN; PACKAGE: None; PRICE: None; PURCHASE-URL: https://pricing.snapeda.com/search/part/JS202011JAQN/?ref=eda
SWIO1-SWIO3 SWIO5 SWIO7-SWIO9 TP5 = testpad
U1 = circuitects; AVAILABILITY: In Stock; DESCRIPTION: 3µA 1-Cell/2-Cell Fuel Gauge with ModelGauge; MF: Analog Devices; MP: MAX17048G+; PACKAGE: TDFN-8 Maxim; PRICE: None; PURCHASE-URL: https://pricing.snapeda.com/search/part/MAX17048G+/?ref=eda
U3 = SparkFun-PowerIC; PROD_ID: VREG-12457
U4 = circuitects; AVAILABILITY: In Stock; DESCRIPTION: Bluetooth, WiFi 802.11b/g/n, Bluetooth v5.0 Transceiver Module 2.412GHz ~ 2.484GHz PCB Trace Surface Mount; MF: Espressif Systems; MP: ESP32-C3-MINI-1-N4; PACKAGE: SMD-53 Espressif Systems; PRICE: None; PURCHASE-URL: https://pricing.snapeda.com/search/part/ESP32-C3-MINI-1-N4/?ref=eda
U6 = SparkFun-IC-Memory; PROD_ID: IC-15107
U7 = circuitects; PROD_ID: IC-15502
U8 = circuitects; DESCRIPTION: Quad 1.5-pF, 5.5-V, ±8-kV ESD protection diode with 1-nA max leakage & VCC pin for USB 2.0; DIGI-KEY_PART_NUMBER: 296-21887-2-ND; MF: Texas Instruments; MP: TPD4E001DRLR; PACKAGE: SOT-5X3-6 Texas Instruments; PURCHASE-URL: https://pricing.snapeda.com/search?q=TPD4E001DRLR&ref=eda
U$13 = OSHWA
U$59 = Qwiic#Label#Full#M#png (6)
Y2 = SparkFun-Clocks; PROD_ID: XTAL-15540

## Nets
1.1V: C49.1 C50.1 C51.1 U7.23 U7.45 U7.50
!ADC_RESET: R47.2 U$3.29
!RESET!: SW5.B' U7.26
+1.8V: C2.1 C30.1 C46.1 C47.1 C59.1 C70.1 SWIO5.TP U$26.5 U$30.D6 U$30.E1 U$31.4
+3V3: C3.2 C14.1 C16.1 C24.1 C25.1 C35.2 C38.1 C39.1 C40.1 C41.1 C42.1 C48.1 C52.1 J1.2 J4.4 K1.1 K1.17 LED1.3 LED1.7 LED1.8 R5.2 R7.1 R22.2 R23.2 R24.2 R25.2 R33.1 SWIO1.TP U3.5 U4.3 U6.8 U7.1 U7.10 U7.22 U7.33 U7.42 U7.44 U7.48 U7.49 U$7.1 U$9.1 U$10.1 U$11.1 U$30.D3 U$38.8
+5V: D8.A K1.2 K1.4 R4.1
ALRT: R25.1 U1.5
AVDD: C53.1 R24.1 U7.43
BOOT: R21.2 SW4.B' U$24.2
CHR_STUS: R48.1 U5.1
D+: J5.A6 J5.B6 R8.1 U8.5
D-: J5.A7 J5.B7 R10.1 U8.4
ECG_CS: U7.7 U$30.E6
ECG_VCM: C33.1 R41.1 U$30.C1
ECGN: C43.1 C45.2 R40.2 U$30.A6
ECGN1: C66.1 JP3.TIP R40.1 R42.1
ECGP: C44.1 C45.1 R39.2 U$30.A5
ECGP1: C63.1 JP3.RING R39.1 R43.1
EN: K1.29 S2.2 U3.3 U$26.3
ESP32_CS: U4.16 U7.12
ESP32_MISO: R2.2 U4.5
ESP32_SD_TFT_MISO: J4.7 K1.21 R2.1 U7.11
ESP32_SD_TFT_MOSI: J4.3 K1.19 U7.14
ESP32_SD_TFT_SCK: J4.5 K1.23 U7.13
ESP32_UART_CTS: U4.19 U7.39
ESP32_UART_RTS: U4.18 U7.38
ESP32_UART_RXD: R37.2 U4.21
ESP32_UART_TXD: R36.2 U4.20
ESP_BOOT: SW1.B' U4.23
ESP_RST: C4.2 R23.1 SW2.B' U4.8
FCLK: TP2.P$1 U$30.D5 U$31.3
GND: C1.2 C2.2 C3.1 C4.1 C5.2 C6.1 C7.1 C8.2 C9.2 C10.2 C11.2 C12.2 C13.2 C14.2 C15.1 C16.2 C18.2 C19.2 C22.2 C24.2 C25.2 C27.2 C28.2 C29.2 C30.2 C31.1 C32.2 C33.2 C34.2 C35.1 C36.1 C37.1 C38.2 C39.2 C40.2 C41.2 C42.2 C43.2 C44.2 C46.2 C47.2 C48.2 C49.2 C50.2 C51.2 C52.2 C53.2 C59.2 C64.2 C65.2 C67.2 C68.2 C70.2 D1.2 D2.2 D3.2 D5.2 D6.A J1.1 J3.GND J3.GND2 J3.SHLD1 J3.SHLD2 J3.SHLD3 J3.SHLD4 J3.SHLD5 J3.SHLD6 J3.SHLD7 J3.SHLD8 J4.6 J5.GND J5.GND2 J5.SHLD1 J5.SHLD2 J5.SHLD3 J5.SHLD4 J5.SHLD5 J5.SHLD6 J5.SHLD7 J5.SHLD8 J6.2 J6.S1 J6.S2 J7.2 J7.S1 J7.S2 JP6.1 K1.6 K1.9 K1.14 K1.20 K1.25 K1.30 K1.34 K1.39 R1.1 R11.1 R15.2 R16.2 R26.2 R27.2 R30.1 R44.2 SW1.A' SW2.A' SW4.A' SW5.A' U1.1 U1.4 U1.6 U1.9 U3.2 U4.1 U4.2 U4.11 U4.14 U4.36 U4.37 U4.38 U4.39 U4.40 U4.41 U4.42 U4.43 U4.44 U4.45 U4.46 U4.47 U4.48 U4.49_1 U4.49_2 U4.49_3 U4.49_4 U4.49_5 U4.49_6 U4.49_7 U4.49_8 U4.49_9 U4.50 U4.51 U4.52 U4.53 U5.2 U6.4 U7.19 U7.EPAD U8.3 U$3.3 U$3.8 U$3.12 U$3.13 U$3.16 U$3.19 U$3.32 U$3.36 U$3.40 U$3.EXP@6 U$3.EXP@7 U$3.EXP@10 U$3.EXP@11 U$24.3 U$26.2 U$30.B3 U$30.B4 U$30.C3 U$30.C4 U$30.C5 U$30.D4 U$31.2 U$38.4 U$38.9 X1.7 X1.G1 X1.G2
INN: D3.1 U$3.1 X1.5
INP: D2.1 U$3.2 X1.9
INT2B: U$30.E2
INTB: U7.31 U$30.D2
LED1: R51.2 U7.34
LED2: R49.1 U7.32
LED_DRV_SUP: C10.1 C28.1 D1.3 D5.3 U$3.17 U$3.18 U$11.2
MISO: U7.6 U$3.25 U$30.E3
MOSI: U7.5 U$3.26 U$30.E4
N$1: R1.2 S2.1
N$2: LED1.4 R48.2
N$3: JP_SW3.3 K1.16
N$4: R3.1 U7.2
N$5: R6.1 U7.3
N$6: R9.2 U7.24
N$7: J5.B5 R15.1
N$8: C22.1 C37.2 D10.C Q3.2 S2.3 U3.1 U$26.1
N$9: C6.2 U$3.38 U$4.2
N$10: J5.A5 R16.1
N$11: SWIO3.TP U4.6
N$12: SWIO8.TP U4.30
N$13: C7.2 U$3.37 U$4.1
N$14: R18.2 U7.21
N$15: C8.1 U$3.7
N$16: TP4.P$1 U$3.30
N$17: SWIO9.TP U4.31
N$18: R11.2 U5.5
N$19: C36.2 U7.20 Y2.P3
N$20: C31.2 R18.1 Y2.P1
N$21: J3.B5 R26.1
N$25: C15.2 U4.12 U$19.P$2
N$26: J3.A5 R27.1
N$27: C1.1 U4.13 U$19.P$1
N$28: R37.1 U7.36
N$29: R36.1 U7.37
N$31: SWIO2.TP U4.22
N$32: R12.2 U7.25
N$36: LED1.1 LED1.2 R49.2
N$46: LED1.6 R51.1
N$53: C29.1 U$30.C6
N$55: C26.2 U$30.B5
N$56: C32.1 U$30.D1
N$57: C34.1 U$30.B1
N$59: JP3.SLEEVE R41.2
N$60: C26.1 U$30.B6
N$61: C63.2 U$30.A1
N$62: C66.2 U$30.A2
N$63: C67.1 C69.1 R42.2 U$30.A3
N$64: C68.1 C69.2 R43.2 U$30.A4
N$65: R44.1 U$30.B2
QSPI-0: U6.5 U7.53
QSPI-1: U6.2 U7.55
QSPI-2: U6.3 U7.54
QSPI-3: U6.7 U7.51
QSPI-CLK [Clock]: U6.6 U7.52
QSPI-CS: R21.1 R22.1 U6.1 U7.56
RP_D+: J3.A6 J3.B6 R20.1 U8.1
RP_D-: J3.A7 J3.B7 R19.1 U8.2
RX_ANA_SUP: C11.1 C18.1 D2.3 D3.3 U$3.33 U$3.39 U$7.2
RX_DIG_SUP: C12.1 C19.1 R47.1 U$3.31 U$9.2
SCK: U7.4 U$3.24 U$30.E5
SD_CS: J4.2 R5.1 U7.16
SPO2_CS: U7.30 U$3.27
SPO2_DRDY: U7.28 U$3.28
SPO2_START: U7.29 U$3.20
SW1: K1.26 U7.15
SW2: K1.31 U7.17
SW3: JP_SW3.2 U7.18
SWDCK: J6.1 R9.1
SWDIO: J6.3 R12.1
TFT_BKL: K1.12 U7.27
TFT_CS: K1.24 U7.41
TFT_DC: K1.22 U7.35
TFT_RESET: K1.36 U7.40
TMP_SCL: J1.4 K1.5 R7.2 U1.7 U7.9 U$38.6
TMP_SDA: J1.3 K1.3 R33.2 U1.8 U7.8 U$38.5
TX_CTRL_SUP: C9.1 C27.1 U$3.11 U$10.2
TXN: D1.1 U$3.14 X1.3
TXP: D5.1 U$3.15 X1.2
U0RXD: J7.1 JP_SW3.1 K1.8 R6.2
U0TXD: J7.3 K1.10 R3.2
USB_D+: R8.2 U4.27
USB_D-: R10.2 U4.26
USB_F_N: R19.2 U7.46
USB_F_P: R20.2 U7.47
VBAT: C5.1 C65.1 JP6.2 Q3.3 U1.2 U1.3 U5.3
VBUS: D6.C D9.A J3.VBUS1 J3.VBUS2 J5.VBUS1 J5.VBUS2 TP5.TP U8.6
VCM: C13.1 U$3.4
VDD: C64.1 D8.C D9.C D10.A LED1.5 Q3.1 R4.2 R30.2 SWIO7.TP U5.4